# Altium PCB MACH_NGUON.PcbDoc
Units mm, origin at the board's own origin, x right, y up, seen from the top; angles counter-clockwise.
Board outline 152.4 x 101.6 mm, 2 copper layers (Top Layer, Bottom Layer); 29 components, 15 nets, 65 pads, 0 vias.
Unrouted connection lines stored in the file: 47.
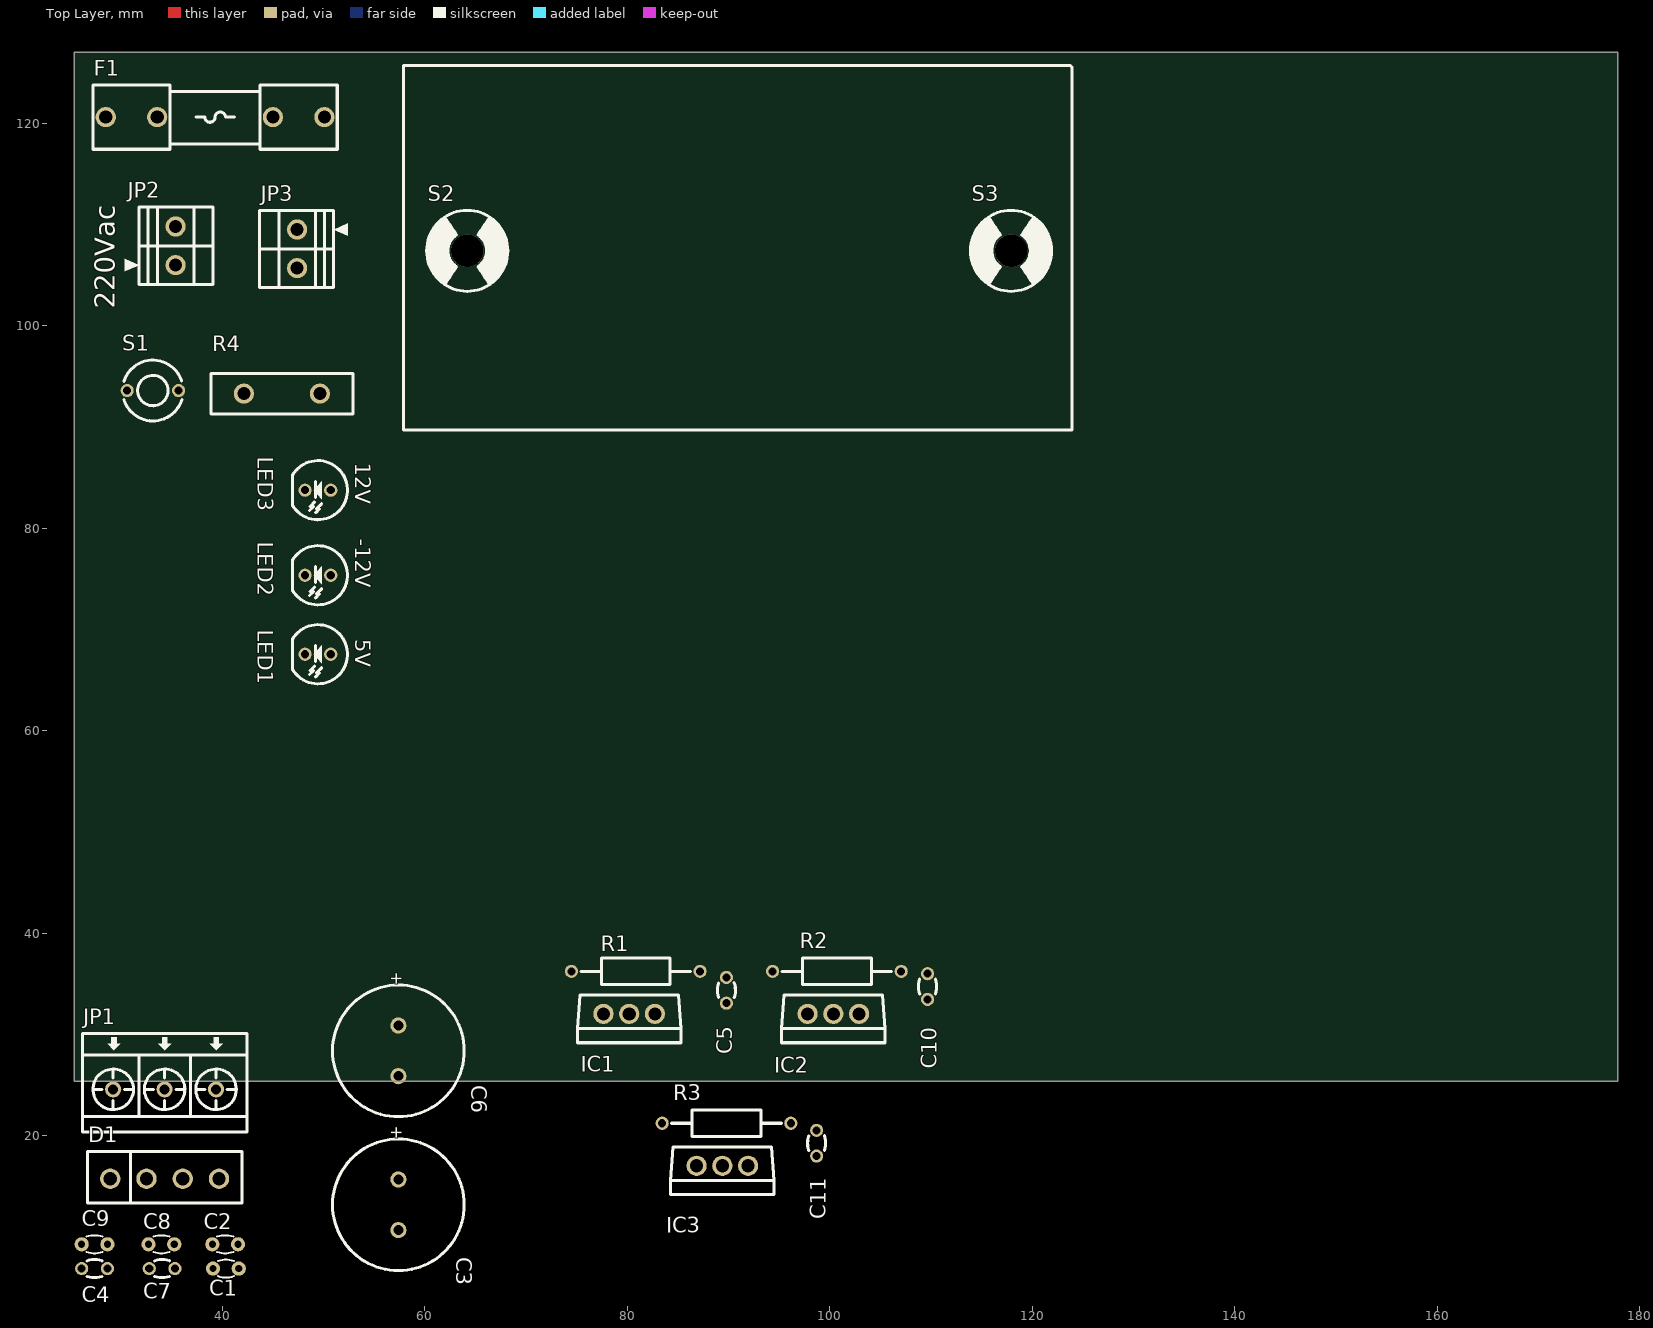
[diagram p0: Top Layer view]
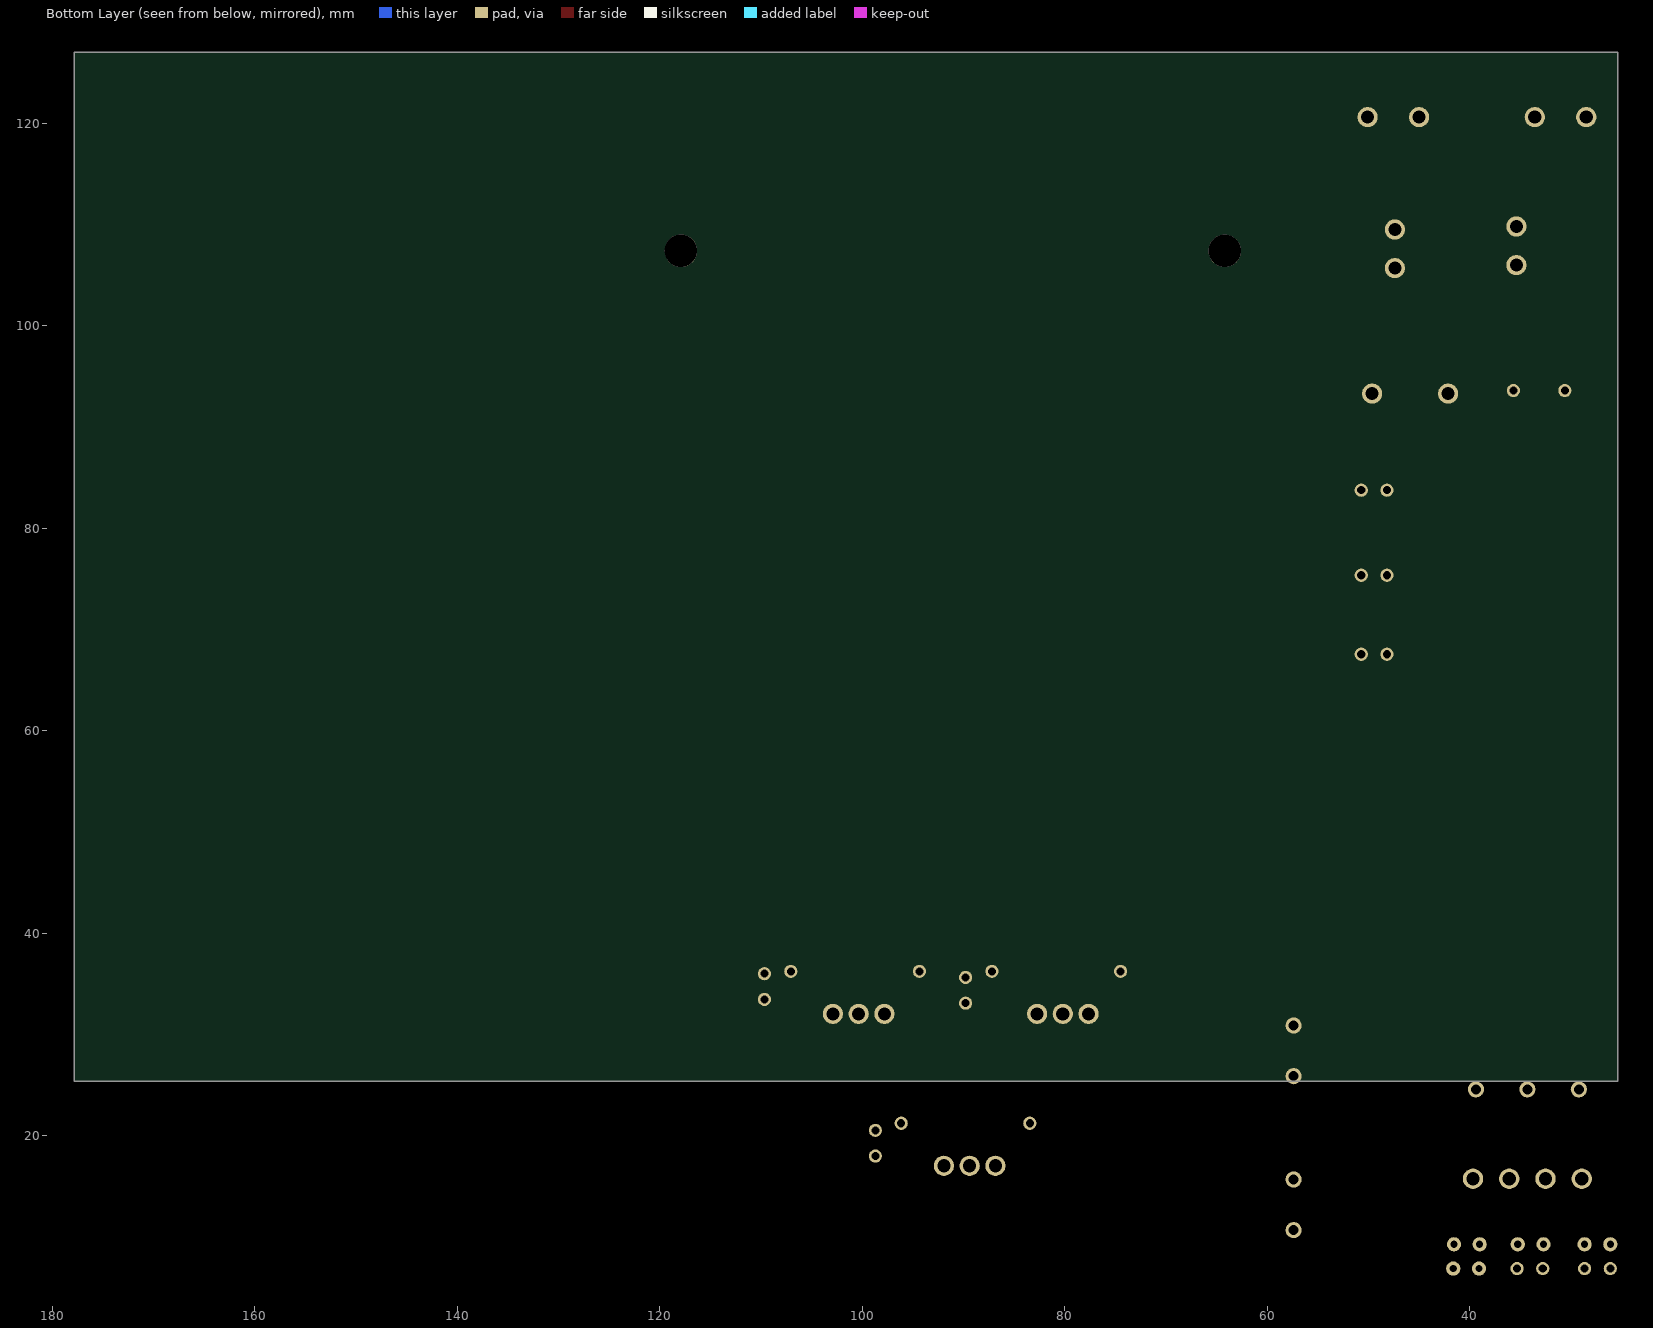
[diagram p1: Bottom Layer view, seen from below]

## Layer stack, top to bottom
Top Solder: solder mask 0.0102, Solder Resist, Dk 3.5
Top Layer: signal copper 0.0356
Dielectric 1: dielectric 0.32, FR-4, Dk 4.8
Bottom Layer: signal copper 0.0356
Bottom Solder: solder mask 0.0102, Solder Resist, Dk 3.5

## Board outline
25.4,25.4 177.8,25.4 177.8,127 25.4,127

## Design rules (kind name [scope] priority, off if disabled: settings)
Clearance [All] p1: gap=0.254 ignorepadtopadclearanceinfootprint=FALSE except(0: Arc-Hole Track-Hole SMDPad-Hole THPad-Hole Via-Hole Fill-Hole Poly-Hole Region-Hole Text-Hole)
PolygonConnect [All] p1: connectstyle=Relief reliefconductorwidth=0.254 reliefentries=4 polygonreliefangle="90 Angle" airgapwidth=0.254
RoutingVias [All] p1: holewidth=0.711 width=1.27 viastyle="Through Hole" minholewidth=0.711 minwidth=1.27 maxholewidth=0.711 maxwidth=1.27
SolderMaskExpansion [All] p1: expansion=0.102
Width [All] p1: maxlimit=0.254 minlimit=0.254 preferedwidth=0.254
30 further rules are at their usual default settings.

## Components (designator, comment, footprint, x,y, rotation, side; value= is the part's Value field where it differs from the comment)
C1 "5AK102KABAA" CAPNTO2.54-3.05x1.78A 40.37,6.9 r180 top value=203
C2 "5AK102KABAA" CAPNTO2.54-3.05x1.78A 40.3,9.3 r0 top value=203
C3 "2200UF" CAP_2200UF_25V 57.4,15.7 r270 top value=10uF/50V
C4 "5AK102KABAA" "Tu gom 104" 27.4,6.9 r180 top value=104
C5 "5AK102KABAA" "Tu gom 104" 89.79,34.38 r90 top value=104
C6 "2200UF" CAP_2200UF_25V 57.4,30.9 r270 top value=10uF/50V
C7 "5AK102KABAA" "Tu gom 104" 34.07,6.9 r180 top value=104
C8 "5AK102KABAA" CAPNTO2.54-3.05x1.78A 34,9.3 r0 top value=203
C9 "5AK102KABAA" CAPNTO2.54-3.05x1.78A 27.4,9.3 r180 top value=203
C10 "5AK102KABAA" "Tu gom 104" 109.65,34.75 r270 top value=104
C11 "5AK102KABAA" "Tu gom 104" 98.7,19.28 r90 top value=104
D1 "Bridge1" "BRIDGE DIODE 2A" 34.32,15.9 r0 top
F1 "F1A" FUSE2_5A 39.3,120.6 r0 top value=Fuse
IC1 "LM7805" LM7805 80.19,32.05 r180 top
IC2 "LM7912" LM7805 100.35,32.05 r180 top value=LM7905
IC3 "LM7812" LM7805 89.39,17.05 r180 top value=LM7805
JP1 "ED2610-ND" DOMINO_OSTTC_3P 34.32,24.6 r0 top value="Connector 3"
JP2 "220Vac" DOMINO-MKDS-2-PIN 35.4,105.99 r90 top value="Connector 2"
JP3 "220Vac" DOMINO-MKDS-2-PIN 47.4,109.5 r270 top value="Connector 2"
LED1 "RED LED 5mm" LED5R 50.724,67.562 r180 top
LED2 "RED LED 5mm" LED5R 50.724,75.362 r180 top
LED3 "RED LED 5mm" LED5R 50.724,83.762 r180 top
R1 "1k" "RES 1/4W CFR25" 87.19,36.25 r180 top
R2 "1k" "RES 1/4W CFR25" 107.05,36.25 r180 top
R3 "1k" "RES 1/4W CFR25" 83.45,21.25 r0 top
R4 "Res Varistor" VARISTOR 45.9,93.3 r180 top
S1 "SW-PB" "BUTTON 2PIN TRON" 30.62,93.6 r0 top
S2 "Screw" "Screw 3.0 v2" 64.2,107.4 r90 top
S3 "Screw" "Screw 3.0 v2" 117.9,107.4 r90 top

## Footprints (in the part's own frame and the unit in brackets; to place one, negate y for a bottom-side part, rotate by r counter-clockwise, add the part's x,y. Pads: shape width x height; smd on the part's side, far side on the other; paste and mask are expansions set on the pad)
"BRIDGE DIODE 2A" [mm] "KBP206 bridge diode 2A"
  round 2 hole 1.3 mask+0.1: 1(-5.37,-0.13) 2(-1.79,-0.13) 3(1.79,-0.13) 4(5.37,-0.13)
  silkscreen extent -7.62,-2.54 7.62,2.54
"BUTTON 2PIN TRON" [mm] "PIN TO PIN 5.08, W=6MM"
  round 1.3 hole 0.8: 1(0,0) 2(5.08,0)
  silkscreen extent -0.33,-3 5.4,3
CAP_2200UF_25V [mm] "Capacitor, Electrolytic, Radial; Body 12.5 x 25 mm (Dia.xH typ); Pin Spacing 5 mm (typ)"
  round 1.6 hole 1: 1(0,0) 2(5,0)
  silkscreen extent -4,-6.5 9,6.5
CAPNTO2.54-3.05x1.78A [mm] "Capacitor, Radial, Tantalum, Non-Polarised; Body 3.05 x 1.78 x 3.43 mm (WxTxH max); Pin Spacing 2.54 mm (typ)"
  round 1.4 hole 0.7: 1(-1.27,0) 2(1.27,0)
  silkscreen extent -0.8,-0.89 0.8,0.89, body extent -2.92,-0.85 2.92,0.85, height 6.42
DOMINO-MKDS-2-PIN [mm] "DOMINO 2 PIN, PIN TO PIN 3.81MM"
  round 2 hole 1.3 mask+0.1: 1(0,0) 2(3.81,0)
  silkscreen extent -1.9,-3.7 5.71,5, body extent -1.91,-3.7 5.71,3.6, height 8.5
DOMINO_OSTTC_3P [mm] "15A PIN TO PIN 5.08MM ED2610-ND"
  round 1.6 hole 1 mask+0.1: 1(-5.08,0) 2(0,0) 3(5.08,0)
  silkscreen extent -8.12,-4.2 8.12,5.5, body extent -7.96,-3.75 7.88,5.25, height 12.5
FUSE2_5A [mm] "Fuse 2.5A  250V"
  round 2 hole 1.3: 1(-10.795,0) 1(-5.715,0) 2(5.715,0) 2(10.795,0)
  silkscreen extent -12.06,-3.17 12.06,3.17, body extent -11.3,-3.09 11.4,3.1, height 9.6
LED5R [mm] "LED, RED, 2 LEAD, 5mm"
  round 1.3 hole 0.8: 1(0,0) 2(2.54,0)
  silkscreen extent -1.65,-2.92 3.77,2.92, body extent -1.71,-3.01 3.71,3.01, height 12.31
LM7805 [mm] "POWER IC 7805"
  round 2 hole 1.3: 1(-2.54,0) 2(0,0) 3(2.54,0)
  silkscreen extent -5.1,-1.85 5.1,2.85, body extent -5.56,-1.63 5.65,3.06, height 19.17
"RES 1/4W CFR25" [mm] "Axial Device, Thru-Hole; 2 Leads fi 0.55"
  round 1.3 hole 0.8 mask+0.1: 1(0,0) 2(12.7,0)
  silkscreen extent 0.94,-1.3 11.76,1.3, body extent 0.97,-1.16 11.74,1.16, height 2.93
"Screw 3.0 v2" [mm] "Hole 3.2mm outline 8mm"
  round 3.2 hole 3.2 mask+0.1: 1(0,0)
  silkscreen extent -4,-4 4,4, body extent -2.5,-2.5 2.5,2.5, height 1.73
"Tu gom 104" [mm] "Capacitor, Radial, Tantalum, Non-Polarised; Body 3.05 x 1.78 x 3.43 mm (WxTxH max); Pin Spacing 2.54 mm (typ)"
  round 1.3 hole 0.8: 1(-1.27,0) 2(1.27,0)
  silkscreen extent -0.73,-0.89 0.76,0.89, body extent -2.92,-0.85 2.92,0.85, height 6.42
VARISTOR [mm] "DIP"
  round 2 hole 1.3 mask+0.1: 1(-3.75,0) 1(-3.75,0) 2(3.75,0)
  silkscreen extent -7,-2 7,2, body extent -5.6,-0.95 5.7,0.9, height 16.5

## Part data
C1 C2 C4 C5 C7 C8 C9 C10 C11: "CAP NPO CAPNTO 1nF 100V 10%", ComponentLink1Description=Datasheet, ComponentLink1URL="D:\Dropbox\Datasheets\Passive Components\Capacitors\AVX Disc Ceramic Capacitors.pdf", Unit Price=0.003
C3 C6: library part CP1, "Cap P  0,1uF < 22uF , 16 - 50V", Description 1="10 => 220uF/6,3V/10V - 10uF => 100uF/16V", Description 2="0,1uF => 33uF/50V - 10uF => 22uF/63V", Description 3="0,47uF => 10uF/100V"
D1: "Full Wave Diode Bridge", DatasheetVersion=E2732B, LatestRevisionDate=29-May-2009, LatestRevisionNote="Sch pins A & K swapped.", PackageDescription="Bridge Rectifier; 4 Terminals; Body 9.4 x 9.4 mm (typ); Pitch 5.08 mm", PackageReference=D-38, Published=8-Jun-2000, Publisher="Altium Limited"
F1: library part Fuse, "Fuse", Designed by=VanDungEvn
IC1 IC3: library part LM78xx, "On ap +, from + 5 to + 24VDC", =LM7808
IC2: library part LM79xx, "On ap -, from - 5 to - 24VDC", =LM7808
JP1: library part Con3_1, "Connector 3"
JP2 JP3: library part Con2, "Connector 2"
LED1 LED2 LED3: library part LED_RED_5MM, "LED Red 5mm", Color=Red, Current - Test=10mA, Manufacturer="Broadcom Limited", Manufacturer Part Number=HLMP-3316, Millicandela Rating=60mcd, Package / Case=Radial, Supplier Device Package="T-1 3/4", Supplier Part Number 1=516-1335-ND, Voltage - Forward (Vf) (Typ)=1.9V, BuyLink=http://www.tme.vn/Product.aspx?id=1277#page=pro_info, Category=Optoelectronics, ComponentLink1Description=https://docs.broadcom.com/docs/AV02-1023EN, ComponentLink1URL=https://docs.broadcom.com/docs/AV02-1023EN, Cost (VNÐ)=1000, Features=-, Height (Max)=9.19mm, Lens Color=Red, Lens Style/Size="Round with Domed Top, 5mm (T-1 3/4), 4.83mm", Lens Transparency=Clear, Mounting Type="Through Hole", Packaging=Bulk, Part Status=Active, Pricing 1="1=0.41, 10=0.294, 25=0.24, 100=0.192, 250=0.162, 500=0.138, 1000=0.108, 2500=0.099 (USD)", RoHS="RoHS Compliant", Size / Dimension=-, Stock 1=11943, Supplier 1=Digi-Key, Viewing Angle=35°, Wavelength - Dominant=626nm, Wavelength - Peak=635nm
R1 R2 R3: library part "Tr? 330R 1/4W", "CF14JT330RTR-ND 330R 1/4W", Manufacturer="Stackpole Electronics Inc.", Manufacturer Part Number=CF14JT330R, Operating Temperature="-55°C ~ 155°C", Package / Case=Axial, Power (Watts)="0.25W, 1/4W", Resistance (Ohms)=330, Supplier Part Number 1=CF14JT330RTR-ND, Temperature Coefficient="0/ -400ppm/°C", Tolerance=±5%, BuyLink=http://www.tme.vn/Product.aspx?id=1004#page=pro_info, Category=Resistors, ComponentLink1Description=https://www.seielect.com/Catalog/SEI-CF_CFM.pdf, ComponentLink1URL=https://www.seielect.com/Catalog/SEI-CF_CFM.pdf, Composition="Carbon Film", Cost (VNÐ)=50, Failure Rate=-, Features="Flame Retardant Coating, Safety", Height - Seated (Max)=-, Packaging="Tape & Reel (TR)", Part Status=Active, Pricing 1="5000=0.00475, 10000=0.00413, 25000=0.00363, 50000=0.00333, 125000=0.00326 (USD)", RoHS="RoHS Compliant", Size / Dimension="0.091\" Dia x 0.236\" L (2.30mm x 6.00mm)", Stock 1=240000, Supplier 1=Digi-Key, Supplier Device Package=Axial
R4: "Varistor (Voltage-Sensitive Resistor)", Code_IPC=RESC2012, LatestRevisionDate=29-May-2009, LatestRevisionNote="IPC-7351 Footprint Added.", PackageDescription="Chip Resistor 0805 Case Size", PackageReference=6-0805, PackageVersion=Mar-2003, Published=24-Mar-1999, Publisher="Altium Limited"
S1: "Switch", LatestRevisionDate=17-Jul-2002, LatestRevisionNote="Re-released for DXP Platform.", PackageDescription="Switch; 2 Leads", PackageReference=SPST-2, Published=24-Mar-1999, Publisher="Altium Limited"

## Nets (pads, with @x,y where several pads share a name; then routed paths per layer and width w, separated by ;. In a path a pad name is that pad's centre, name@x,y a point inside that pad or via, vN(x,y) a via of type N, cw(c..) or ccw(c..) an arc to the next point about the centre after c; other vN are vias at no path point)
5V: C5.2 IC1.3 R1.2
12V: C11.2 IC3.3 R3.2
-12V: C10.2 IC2.3 R2.2
A: C1.2 C3.1 C4.2 C9.2 D1.1 IC1.1 IC3.1
B: C2.1 C6.2 C7.1 C8.2 D1.3 IC2.2
GND: C3.2 C4.1 C5.1 C6.1 C7.2 C10.1 C11.1 IC1.2 IC2.1 IC3.2 JP1.2 LED1.2 LED2.2 LED3.2
NetC1_1: C1.1 C2.2 D1.4 JP1.3
NetC8_1: C8.1 C9.1 D1.2 JP1.1
NetF1_1: F1.1 JP2.2
NetF1_2: F1.2 JP3.2 R4.1
NetJP2_1: JP2.1 S1.1
NetJP3_1: JP3.1 R4.2 S1.2
NetLED1_1: LED1.1 R1.1
NetLED2_1: LED2.1 R2.1
NetLED3_1: LED3.1 R3.1
pads on no net: S2.1 S3.1

## Silkscreen, mask and mechanical layers (free items; w line width, h text height)
Top Overlay:
  lines w0.3: 57.9,89.7 123.9,89.7 123.9,125.544 123.744,125.7 57.9,125.7 57.9,89.7
  text "220Vac" at 29.4,101.7 h2 r90
  text "12V" at 53.124,86.462 h1.52 r270
  text "-12V" at 53.124,78.962 h1.52 r270
  text "5V" at 53.124,69.062 h1.52 r270
Mechanical 2:
  lines w0.05: 54,122.7 54,123 ; 57.9,89.7 123.9,89.7 123.9,125.7 57.9,125.7 57.9,89.7
Mechanical 3:
  lines w0.05: 123.9,89.7 123.9,125.7 57.9,125.7 57.9,89.7 123.3,89.7 123.9,89.7 ; 123.9,89.7 123.9,89.7

## Text inside footprints (layer, text, board x,y; h text height)
C3: Top Overlay "+" at 56.7,21 h1.2 r270; Mechanical 1 "+" at 56.7,18.6 h1.5 r270; Mechanical 1 "1" at 56.8,15.9 h1.2 r270; Mechanical 1 "2" at 56.8,11 h1.2 r270
C6: Top Overlay "+" at 56.7,36.2 h1.2 r270; Mechanical 1 "+" at 56.7,33.8 h1.5 r270; Mechanical 1 "1" at 56.8,31.1 h1.2 r270; Mechanical 1 "2" at 56.8,26.2 h1.2 r270
D1: Mechanical 1 "1" at 28.82,15.2 h1.2; Mechanical 1 "4" at 39.22,15.1 h1.2; Mechanical 1 "+" at 28.62,16.9 h1.2; Mechanical 1 "-" at 39.42,16.8 h1.2; Mechanical 1 "~" at 32.12,16.1 h1.2; Mechanical 1 "~" at 35.82,16.1 h1.2
IC1: Mechanical 1 "I" at 82.857,30.526 h1.2 r180; Mechanical 1 "G" at 80.571,30.526 h1.2 r180; Mechanical 1 "O" at 78.031,30.526 h1.2 r180
IC2: Mechanical 1 "I" at 103.017,30.526 h1.2 r180; Mechanical 1 "G" at 100.731,30.526 h1.2 r180; Mechanical 1 "O" at 98.191,30.526 h1.2 r180
IC3: Mechanical 1 "I" at 92.057,15.526 h1.2 r180; Mechanical 1 "G" at 89.771,15.526 h1.2 r180; Mechanical 1 "O" at 87.231,15.526 h1.2 r180
JP1: Mechanical 2 "3" at 39,24 h1.2; Mechanical 2 "1" at 29.04,24 h1.2; Mechanical 2 "2" at 33.92,24 h1.2
JP2: Mechanical 1 "2" at 35.8,109.69 h1 r90; Mechanical 1 "1" at 35.8,105.905 h1 r90; Mechanical 1 "CN?" at 35.45,107.895 h1 r90
JP3: Mechanical 1 "2" at 47,105.8 h1 r270; Mechanical 1 "1" at 47,109.585 h1 r270; Mechanical 1 "CN?" at 47.35,107.595 h1 r270